# Altium PCB dsau-motherboard-revA.PcbDoc (part 3 of 4)
Units mil, origin at the board's own origin, x right, y up, seen from the top; angles counter-clockwise.
Board outline 9475 x 6400 mil, 4 copper layers (Component Side, Ground Plane, Power Plane, Solder Side), stack 65.2 mil thick; 212 components, 202 nets, 998 pads, 1047 vias.
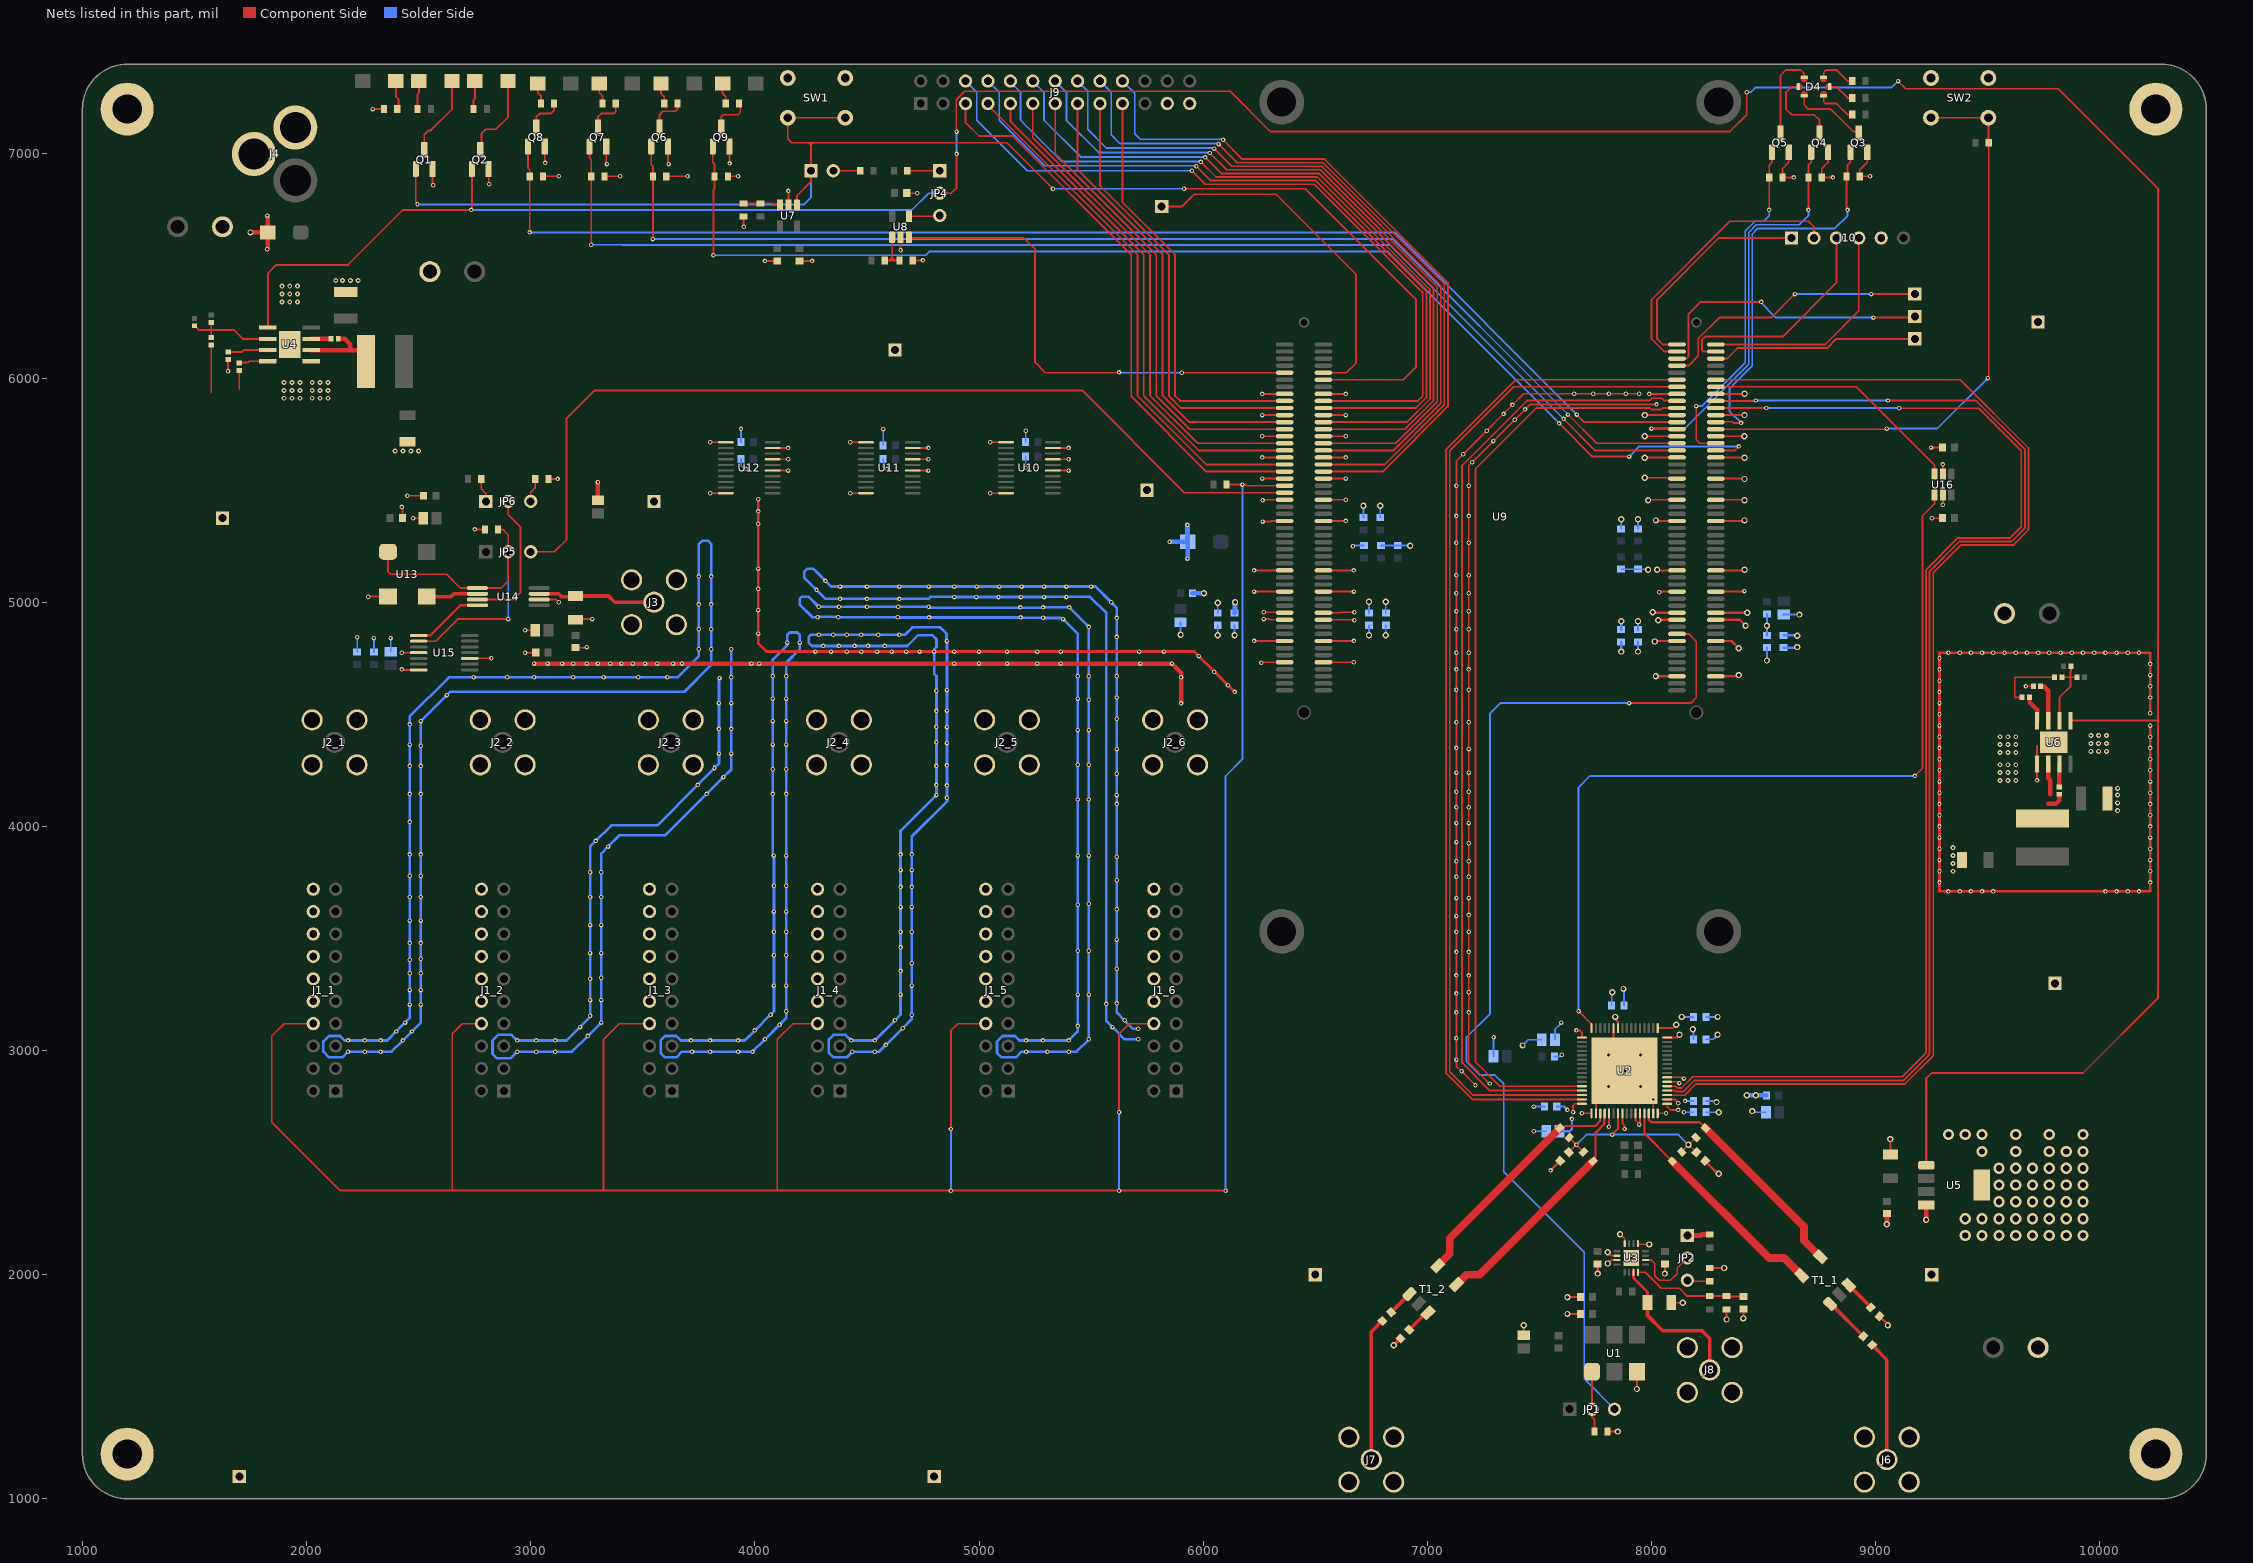
[diagram p5: the nets of this part, all layers, seen from the top]

## Via types
v1: diameter 20, hole 10, Component Side to Solder Side, 768 vias
v2: diameter 28, hole 16, Component Side to Solder Side, 117 vias
v3: diameter 22, hole 10, Component Side to Solder Side, 104 vias
v4: diameter 50, hole 28, Component Side to Solder Side, 46 vias
v5: diameter 28, hole 16, Component Side to Solder Side, tented top, 6 vias
v6: diameter 25.98, hole 12.99, Component Side to Solder Side, tented top, 5 vias
v7: diameter 25.98, hole 10, Component Side to Solder Side, tented top, 1 vias

## Nets (pads, with @x,y where several pads share a name; then routed paths per layer and width w, separated by ;. In a path a pad name is that pad's centre, name@x,y a point inside that pad or via, vN(x,y) a via of type N, cw(c..) or ccw(c..) an arc to the next point about the centre after c; other vN are vias at no path point) (continued)
GND: C2_1.2 C2_2.2 C3_1.1 C3_2.1 C4.2 C6.2 C7.2 C8.2 C9.2 C10.2 C11.2 C12.2 C13.2 C14.2 C15.2 C16.2 C17.2 C18.2 C19.2 C21.2 C22.2 C25.2 C26.2 C27.2 C28.2 C29.1 C31.1 C33.2 C34.2 C35.2 C36.2 C37.2 C38.2 C39.1 C40.2 C41.2 C42.2 C43.2 C44.2 C45.2 C46.2 C47.2 C48.2 C49.2 C50.2 C51.2 C52.2 C53.2 C54.2 C55.2 C56.2 C57.2 C58.2 C59.2 C60.1 C61.2 C62.1 C63.2 C64.1 C65.2 C66.2 C67.2 C68.2 C69.2 C70.2 C71.2 C72.2 C73.2 C74.2 C75.2 C76.1 C77.2 J1_1.10 J1_1.12 J1_1.14 J1_1.16 J1_1.18 J1_1.20 J1_2.10 J1_2.12 J1_2.14 J1_2.16 J1_2.18 J1_2.20 J1_3.10 J1_3.12 J1_3.14 J1_3.16 J1_3.18 J1_3.20 J1_4.10 J1_4.12 J1_4.14 J1_4.16 J1_4.18 J1_4.20 J1_5.10 J1_5.12 J1_5.14 J1_5.16 J1_5.18 J1_5.20 J1_6.10 J1_6.12 J1_6.14 J1_6.16 J1_6.18 J1_6.20 J2_1.2 J2_2.2 J2_3.2 J2_4.2 J2_5.2 J2_6.2 J3.2 J4.2 J4.3 J5.2 J6.2 J7.2 J8.2 J9.23 J9.25 J10.5 J11.2 J12.2 J13.2 pad.0 Q1.2 Q2.2 Q3.2 Q4.2 Q5.2 Q6.2 Q7.2 Q8.2 Q9.2 R4.2 R7.2 R10.2 R12.1 R15.1 R22.1 R23.1 R24.2 R25.2 R30.1 R31.2 R32.2 R33.2 R34.2 R35.2 R39.2 R40.2 R42.2 R43.1 SW1.2 SW2.2 TP1.1 TP2.1 TP3.1 TP4.1 TP5.1 TP6.1 TP7.1 TP8.1 TP9.1 TP10.1 U1.3 U2.17 U2.18 U2.21 U2.24 U2.27 U2.28 U2.31 U2.32 U2.39 U2.49 U2.59 U2.65 U3.9 U3.12 U3.14 U3.15 U3.17 U4.5 U4.EPAD U5.4 U5.5 U6.5 U6.EPAD U7.2 U8.2 U9.15 U9.16 U9.21 U9.22 U9.27 U9.28 U9.33 U9.34 U9.39 U9.40 U9.45 U9.46 U9.51 U9.52 U9.65 U9.66 U9.71 U9.72 U9.77 U9.85 U9.86 U9.95 U9.96 U9.115 U9.116 U9.121 U9.122 U9.127 U9.128 U9.133 U9.134 U9.139 U9.140 U9.145 U9.146 U9.151 U9.152 U9.165 U9.166 U9.171 U9.172 U9.177 U9.185 U9.186 U9.191 U9.192 U10.1 U10.10 U10.15 U10.17 U10.19 U11.1 U11.10 U11.15 U11.17 U11.19 U12.1 U12.10 U12.15 U12.17 U12.19 U13.2 U14.2 U15.4 U15.7 U15.10 U16.2 U16.5 | length 72415.3
  Component Side w8: 1575,5935 R7.2@1575,6148.5 ; v1(1650,6030) C27.2@1650,6083.5 ; 1700,5950 C28.2@1700,6033.5 ; v1(2275,5025) U13.2@2363.39,5025 ; v1(2295,7200) R22.1@2345.47,7200 ; v1(2425,4700) 2426.77,4698.23 U15.7@2500,4698.23 ; v1(2425,4775) U15.4@2500,4775 ; v1(2425,5425) 2427.56,5422.44 C68.2@2427.56,5375 ; v1(2450,5475) C67.2@2522.44,5475 ; v1(2475,5375) C66.2@2520.47,5375 ; Q1.2@2562.4,6932.68 2562.4,6862.6 v1(2565,6860) ; U15.10@2728.35,4749.41 2728.94,4750 v1(2825,4750) ; v1(2750,5325) R35.2@2795.47,5325 ; Q2.2@2812.4,6932.68 2812.4,6867.6 v1(2815,6865) ; v1(2975,4775) C71.2@3022.44,4775 ; v1(2975,4875) C70.2@3020.47,4875 ; U14.2@3037.8,5012.2 3112.8,5012.2 v1(3125,5000) ; R33.2@3054.53,6900 v1(3125,6900) ; Q8.2@3062.4,7032.68 3062.4,6962.6 v1(3065,6960) ; R42.2@3079.53,5550 v1(3120,5550) ; C72.2@3200,4797.44 3247.44,4797.44 v1(3250,4800) ; R43.1@3200,4921.85 3203.15,4925 v1(3275,4925) ; R32.2@3329.53,6900 v1(3400,6900) ; Q7.2@3337.4,7032.68 3337.4,6957.6 v1(3340,6955) ; R31.2@3604.53,6900 v1(3700,6900) ; Q6.2@3612.4,7032.68 3612.4,6957.6 v1(3615,6955) ; v1(3800.67,5486.61) U12.10@3870.67,5486.61 ; v1(3800.67,5713.39) U12.1@3870.67,5713.39 ; R34.2@3879.53,6900 v1(3925,6900) ; v1(3887.4,6957.68) Q9.2@3887.4,7032.68 ; v1@3950,6670 v1(3950,6675) R12.1@3950,6720.47 ; v1(4045,6522.44) C39.1@4100,6522.44 ; U12.15@4079.33,5587.4 v1(4149.33,5587.4) ; U12.17@4079.33,5637.8 v1(4149.33,5637.8) ; U12.19@4079.33,5688.19 v1(4149.33,5688.19) ; U7.2@4150,6772.24 v1(4150,6835) ; C37.2@4200,6522.44 v1(4255,6522.44) ; v1(4425.67,5486.61) U11.10@4495.67,5486.61 ; v1(4425.67,5713.39) U11.1@4495.67,5713.39 ; v1(4650,6570) U8.2@4650,6627.76 ; C38.2@4675,6822.44 C38.2@4677.56,6825 v1(4725,6825) ; R15.1@4700,6529.53 R15.1@4704.53,6525 v1(4750,6525) ; U11.15@4704.33,5587.4 v1(4774.33,5587.4) ; U11.17@4704.33,5637.8 v1(4774.33,5637.8) ; U11.19@4704.33,5688.19 v1(4774.33,5688.19) ; v1(5050.67,5486.61) U10.10@5120.67,5486.61 ; v1(5050.67,5713.39) U10.1@5120.67,5713.39 ; U10.15@5329.33,5587.4 v1(5399.33,5587.4) ; U10.17@5329.33,5637.8 v1(5399.33,5637.8) ; U10.19@5329.33,5688.19 v1(5399.33,5688.19) ; v1@6225,5050 v1(6227.36,5047.64) U9.172@6363.39,5047.64 ; v1@6225,5140 v1(6227.12,5142.12) U9.166@6363.39,5142.12 ; v1(6227.16,4827.16) U9.186@6363.39,4827.16 ; v1(6260,4730) 6262.68,4732.68 U9.192@6363.39,4732.68 6278.39,4732.68 ; v1@6263.39,5457.09 U9.146@6363.39,5457.09 ; v1(6263.39,5551.57) U9.140@6363.39,5551.57 ; v1(6263.39,5646.06) U9.134@6363.39,5646.06 ; v1(6263.39,5740.55) U9.128@6363.39,5740.55 ; v1(6263.39,5835.04) U9.122@6363.39,5835.04 ; v1(6263.39,5929.53) U9.116@6363.39,5929.53 ; v1(6265,5360) 6302.4,5360 6305,5362.6 U9.152@6363.39,5362.6 ; U9.191@6536.61,4732.68 v1(6672.32,4732.68) ; U9.185@6536.61,4827.16 v1(6672.84,4827.16) ; U9.177@6536.61,4953.15 6615,4953.15 6616.85,4955 v1(6675,4955) ; U9.171@6536.61,5047.64 v1(6672.64,5047.64) ; U9.165@6536.61,5142.12 v1(6672.12,5142.12) v1@6675,5145 ; U9.139@6536.61,5551.57 v1(6636.61,5551.57) ; U9.133@6536.61,5646.06 v1(6636.61,5646.06) ; U9.127@6536.61,5740.55 v1(6636.61,5740.55) ; U9.121@6536.61,5835.04 v1(6636.61,5835.04) ; U9.115@6536.61,5929.53 v1(6636.61,5929.53) ; 6617.6,5362.6 U9.151@6536.61,5362.6 v1(6636.61,5362.6) ; 6621.61,5457.09 U9.145@6536.61,5457.09 v1(6636.61,5457.09) ; v2@6850,1675 v2(6850,1685) ; v1(7185,3170) v1(7185,3260) ; v1(7185,3335) 7185,3315 ; v1(7185,3440) v1(7185,3530) ; v1@7185,3535 v1(7185,3605) ; v1(7185,3680) 7185,3700 ; v1(7185,3775) 7185,3810 ; v1(7185,3845) v1@7185,3850 ; v1(7185,3925) 7185,3935 ; v1@7185,4080 v1(7185,4155) ; v1(7185,4240) v1(7185,4345) ; v1(7215,2845) v1(7152.79,2907.21) 7130,2930 v1(7130,2960) v1(7130,3055) v1(7130,3170) v1(7130,3255) v1(7130,3335) v1(7130,3440) v1(7130,3530) v1(7130,3600) v1(7130,3680) v1(7130,3775) v1(7130,3845) v1(7130,3930) v1(7130,4015) v1(7130,4085) v1(7130,4155) v1(7130,4240) v1(7130,4350) v1(7130,4465) v1(7130,4610) v1(7130,4700) v1(7130,4775) v1(7130,4880) v1(7130,4960) v1(7130,5040) v1(7130,5120) v1(7130,5265) v1(7130,5520) 7130,5630 v1(7160,5660) v1(7265,5765) v1(7340,5840) v1(7380,5880) 7430,5930 7440,5930 ; v1(7278.11,2853) 7277,2853 7185,2945 v1(7185,3260) ; C15.2@7430,1729.53 v2(7430,1775) ; v2(7625,1825) C17.2@7682.44,1825 ; v2(7625,1900) C16.2@7682.44,1900 ; v1(7655,5930) 7440,5930 ; v1(7689.84,2719.84) U2.17@7732.36,2719.84 ; U2.18@7752.05,2707.05 U2.18@7752.05,2719.84 ; U2.18@7752.05,2732.83 U2.18@7752.05,2719.84 ; R4.2@7804.53,1300 v2(7850,1300) ; v5(7805,2050) 7820.16,2065.16 U3.15@7848.98,2065.16 ; v5(7805,2100) 7820,2085 7848.82,2085 U3.14@7848.98,2084.84 ; v1(7810,2660) 7811.1,2661.1 U2.21@7811.1,2732.83 ; v1(7810,5930) v1(7740,5930) ; 7811.1,2688.9 U2.21@7811.1,2732.83 ; 7811.1,2693.9 U2.21@7811.1,2732.83 ; U2.59@7830.79,3087.17 7830.79,2959.21 v6(7880,2910) ; v5(7860,2180) 7880.47,2159.53 U3.12@7880.47,2136.02 ; U2.24@7870.16,2732.83 7870.16,2674.84 7880,2665 v1(7880,2650) ; v1(7885,5930) 7910,5930 ; U2.27@7929.21,2732.83 7930,2732.83 U2.27@7930,2735 ; U2.27@7930,2719.84 7930,2719.05 U2.27@7929.21,2719.84 7929.21,2688.04 v1@7945,2672.25 ; v2(7935,1490) U1.3@7935,1567.32 ; U3.9@7939.53,2139 7942.5,2136.02 v5@7988.98,2136.02 ; v1@7945,2665 v1(7945,2670) 7948.9,2673.9 U2.28@7948.9,2719.84 U2.28@7948.9,2732.83 ; v1(7945,5930) 7910,5930 ; v2(7970,5555) 8110.46,5555 U9.40@8113.89,5551.57 ; v2(7970,5645) 7971.06,5646.06 U9.34@8113.89,5646.06 ; v2(7970,5740) 7970.55,5740.55 U9.28@8113.89,5740.55 ; v2(7970,5835) v2(7970,5835) U9.22@8113.89,5835.04 ; v2(7985,5455) 7987.09,5457.09 U9.46@8113.89,5457.09 ; v1(7990,5929.53) U9.16@8113.89,5929.53 ; U2.31@8007.95,2707.05 U2.31@8007.95,2719.84 ; U2.31@8007.95,2732.83 U2.31@8007.95,2719.84 ; v2(8020,5365) 8022.4,5362.6 U9.52@8113.89,5362.6 ; v1(8022.47,5882.53) 7458.65,5882.53 v1(7436.11,5860) v1(7390,5813.89) v1(7295,5718.89) v1(7200.56,5624.44) 7199.44,5624.44 7185,5610 v1(7185,4345) ; v2(8025,5145) 8027.88,5142.12 U9.66@8113.89,5142.12 ; U2.32@8027.64,2719.84 v1(8064.84,2719.84) ; U2.49@8027.64,3100.16 8095.16,3100.16 v2(8110,3115) ; v1(8035,5045) 8037.64,5047.64 U9.72@8113.89,5047.64 ; U2.39@8057.17,2880.47 8139.53,2880.47 v1(8145,2875) ; v2(8060,2005) C18.2@8060,2047.44 ; R30.1@8088.15,1875 v2(8140,1875) ; R39.2@8260,2029.53 8324.53,2029.53 v2(8325,2030) ; U9.71@8287.11,5047.64 8412.64,5047.64 v1(8415,5050) ; U9.65@8287.11,5142.12 8412.12,5142.12 v2(8415,5145) ; U9.51@8287.11,5362.6 8412.6,5362.6 v2(8415,5365) ; U9.45@8287.11,5457.09 8412.91,5457.09 v2(8415,5455) ; U9.39@8287.11,5551.57 8413.43,5551.57 v2(8415,5550) ; U9.33@8287.11,5646.06 8413.94,5646.06 v2(8415,5645) ; U9.27@8287.11,5740.55 v2(8414.45,5740.55) v2@8415,5740 ; U9.21@8287.11,5835.04 v2(8415,5835) v2(8415,5835) ; U9.15@8287.11,5929.53 8414.53,5929.53 v2(8415,5930) ; v2(8335,1800) R40.2@8335,1845.47 ; v2(8410,1805) C21.2@8410,1847.44 ; Q5.2@8612.4,7007.68 8612.4,6962.4 8584.53,6934.53 R25.2@8584.53,6895 v1(8634.53,6895) ; Q4.2@8787.4,7007.68 8787.4,6962.4 8759.53,6934.53 R24.2@8759.53,6895 ; 8799.53,6895 R24.2@8759.53,6895 ; v1(8809.53,6895) R24.2@8759.53,6895 ; Q3.2@8962.4,7007.68 8962.4,6962.4 8929.53,6929.53 R23.1@8929.53,6900 v1(8975,6900) ; v2(9065,2605) 9066,2604 C31.1@9066,2536.15 ; v1(9247.44,5690) C77.2@9297.44,5690 9260,5690 ; v1(9250,5375) C76.1@9297.44,5375 ; U16.5@9297.44,5475.2 U16.5@9300,5477.76 v1(9300,5435) ; U16.2@9300,5572.24 v1(9300,5615) ; C36.2@9653.5,4575.35 9620.35,4575.35 9620.35,4665.35 R10.2@9798.5,4665.35 ; v1@9670,4625 v1(9670.35,4625.35) C35.2@9703.5,4625.35 ; v1(9720,4205) U6.5@9720,4278.35 9720,4360 ; v1(7185,3260) 7185,3315 ; 7185,3315 v1(7185,3530) ; v1(7185,3530) v1(7185,3605) ; v1(7185,3605) 7185,3700 ; 7185,3700 7185,3810 ; 7185,3810 v1@7185,3850 ; v1@7185,3850 7185,3935 ; 7185,3935 v1(7185,4155) ; v1(7185,4155) v1(7185,4345) ; 7440,5930 v1(7740,5930) ; v1(7740,5930) 7910,5930 ; U2.18@7752.05,2719.84 7752.05,2782.05 v6(7880,2910) ; v6(7880,2910) v1(8007.95,2782.05) U2.31@8007.95,2719.84
  Component Side w10: v2(8015,4825) 8017.16,4827.16 U9.86@8113.89,4827.16 ; v2(8020,4670) 8020.32,4669.68 U9.96@8113.89,4669.68 ; U9.95@8287.11,4669.68 8384.16,4669.68 v2(8389.48,4675) ; U9.85@8287.11,4827.16 8357.31,4827.16 v2(8389.48,4795) ; U9.77@8287.11,4953.15 v2(8426.85,4953.15)
  Component Side w11.68: v1(7550,2465) C2_2.2@7592.48,2507.48 ; v2(7760,2005) C19.2@7760,2047.44 ; v5@7988.98,2136.02 v5(7990,2135) ; C2_1.2@8239.52,2507.48 8297,2450 v2(8300,2450) ; C3_1.1@9017.49,1814.51 9055,1777 v2(9055,1775)
  Component Side w12: v1(4015,5405) v1(4015,5460) v1(4015,5350) v1(4015,5150) v1(4015,5060) v1(4015,4965) v1(4015,4860) 4015.56,4859.44 4015.56,4815.56 4051.11,4780 v1(4270,4780) v1(4340,4780) v1(4410,4780) v1(4475,4780) v1(4545,4780) v1(4610,4780) v1(4675,4780) v1(4735,4780) v1(4800,4780) v1(4890,4780) v1(5000,4780) v1(5125,4780) v1(5260,4780) v1(5365,4780) v1(5715,4780) v1(5825,4780) 5960,4780 v1(5980,4760) v1(6050,4690) v1(6110.4,4629.6) v1(6140,4600) ; v1(10175,3710) 10220,3710 ; v1(10225,4450) v1@10225,4445 ; v1@10225,4454.35 v1@10225,4445 ; v1(10225,4505) 10225,4775 9285,4775 9285,3710 10220,3710 ; 10220,3710 10225,3710 v1@10225,4445
  Component Side w16.83: v2(6850,1685) C3_2.1@6880.51,1715.51
  Component Side w20: v2(1750,6650) C22.2@1826.18,6650 ; v1(1825,6575) 1826.18,6576.18 C22.2@1826.18,6650 ; v1(1825,6725) 1826.18,6723.82 C22.2@1826.18,6650 ; v1(3015,4726.4) v1(3075,4726.4) v1(3140,4726.4) v1(3190,4726.4) v1(3250,4726.4) v1(3300,4726.4) v1(3355,4726.4) v1(3405,4726.4) v1(3455,4726.4) v1(3510,4726.4) v1(3565,4726.4) v1(3635,4726.4) v1(3675,4726.4) v1(3985,4726.4) v1(4020,4726.4) ; C69.2@3300,5454.53 v1(3300,5535) ; 4150,4726.4 v1(4020,4726.4) ; 4803,4726.4 4775,4726.4 ; 4935,4726.4 v1(4890,4726.4) ; 5065,4726.4 v1(5000,4726.4) ; 5195,4726.4 v1(5125,4726.4) ; 5315,4726.4 v1(5260,4726.4) ; 5420,4726.4 v1(5365,4726.4) ; 5670,4726.4 5655,4726.4 ; v1(5720,4726.4) 5705,4726.4 ; 5825,4726.4 5775,4726.4 ; 5886.17,4701.17 5878.67,4708.67 ; v1(5901.4,4548.6) 5901.4,4640 ; 5901.4,4610 5901.4,4640 ; v2(9225,2245) 9225.98,2245.98 U5.4@9225.98,2311.42 ; v1(4020,4726.4) 4775,4726.4 ; 4775,4726.4 v1(4890,4726.4) ; v1(4890,4726.4) v1(5000,4726.4) ; v1(5000,4726.4) v1(5125,4726.4) ; v1(5125,4726.4) v1(5260,4726.4) ; v1(5260,4726.4) v1(5365,4726.4) ; v1(5365,4726.4) 5655,4726.4 ; 5655,4726.4 5705,4726.4 ; 5705,4726.4 5775,4726.4 ; 5775,4726.4 v1(5860.94,4726.4) 5878.67,4708.67 ; 5878.67,4708.67 5901.4,4685.94 v1(5901.4,4665) 5901.4,4640
  Component Side w22: v2(9050,2225) C29.1@9050,2272.44
  Solder Side w8: v1@2225.02,4845 v1(2225.85,4844.17) C75.2@2225.85,4777.56 ; v1(2300.02,4840) 2300.85,4839.17 C74.2@2300.85,4777.56 ; v1(2375.02,4840) 2375.85,4839.17 C73.2@2375.85,4779.53 ; C65.2@3938.23,5640 3938.23,5611.77 3955,5595 v1(3960,5595) ; C64.1@3938.23,5715 v1(3938.23,5773.23) v1@3940,5775 ; C63.2@4572.44,5639.98 4572.44,5607.56 4585,5595 v1(4590,5595) v1@4590,5590 ; C62.1@4572.44,5699.98 v1(4572.44,5772.44) v1@4575,5775 ; v1(5208.23,5600) C61.2@5208.23,5650 ; C60.1@5208.23,5715 v1(5208.23,5765) ; v2(5899.21,4855) C40.2@5899.21,4910.47 ; C41.2@5930,5268.82 C41.2@5931.18,5270 C41.2@5930,5270 ; v2(6065.02,4852.44) C48.2@6065.02,4897.44 ; v2(6140.02,4852.44) C49.2@6140.02,4897.44 ; v1(6668,5250) 6670.56,5252.56 C42.2@6718,5252.56 ; C52.2@6715,5377.56 v2(6715,5430) ; C46.2@6740.02,4952.56 v2(6740.02,5002.44) ; C50.2@6790,5377.56 v2(6790,5430) ; C44.2@6793,5252.56 C54.2@6868,5252.56 v2(6923,5252.56) ; C47.2@6815.02,4952.56 v2(6815.02,5002.44) ; C4.2@7295.47,2975 v1(7295.47,3059.53) ; v2(7425,3022.88) 7450,3047.88 C8.2@7510.5,3047.88 ; v1(7475,2640) C11.2@7530.47,2640 ; v1(7475,2750) C13.2@7522.44,2750 ; C10.2@7822.44,3200 7822.44,3257.44 v2(7825,3260) ; C53.2@7865.02,5147.44 C51.2@7940.02,5147.44 7982.56,5147.44 v2(7985,5145) ; C43.2@7865.02,5327.56 v2(7865,5370) ; C45.2@7940.02,5327.56 v2(7940,5370) ; C7.2@8242.56,3150 v2(8295,3150) ; C14.2@8242.59,2725 v2(8300,2725) ; C12.2@8242.59,2775 8285,2775 v2(8290,2770) ; C9.2@8242.59,3050 8275,3050 v2(8295,3070) ; v2(8450,2730) 8455,2725 C6.2@8510.5,2725
  Solder Side w10: 4545,4805 4610,4805 ; 4685,4810 4728,4853 4792,4853 4793,4852 ; v2(7865,4780) C57.2@7865.02,4822.44 ; v2(7940,4780) C56.2@7940.02,4822.44 ; v2(8515,4740) C59.2@8515.02,4797.44 ; C58.2@8590.02,4797.44 8647.44,4797.44 v2(8650,4800) ; C55.2@8590.02,4945.47 8659.53,4945.47 v2(8660,4945)
  Solder Side w12: v1(2745,4665) 2730,4665 ; v1(2895,4665) 2960,4665 ; 3750,5192 3750,5185 ; 3750,5215 3750,5200 ; 3820,4270 v1(3820,4260) ; v1@3840.23,4664.32 v1(3842.83,4661.72) 3840,4658.89 v1(3840,4550) v1(3840,4435) v1(3840,4325) 3840,4280 v1(3820,4260) ; 3895,4750 v1(3895,4790) v1(3895,4665) v1(3895,4550) v1(3895,4435) v1(3895,4325) 3895,4255 v1(3860,4220) v1(3785,4145) 3600,3960 3395,3960 v1(3345,3910) 3315,3880 v1(3315,3795) v1(3315,3685) v1(3315,3560) v1(3315,3435) v1(3315,3325) v1(3315,3225) v1(3315,3125) v1(3255,3065) 3185,2995 v1(3110,2995) v1(3025,2995) v1(2940,2995) 2910,2965 2850,2965 2830,2985 2830,3045 2855,3070 2915,3070 v1(2940,3045) v1(3025,3045) v1(3110,3045) 3160,3045 v1(3220,3105) 3265,3150 v1(3265,3155) v1(3265,3225) v1(3265,3320) v1(3265,3435) v1(3265,3560) v1(3265,3685) v1(3265,3795) 3265,3910 v1(3290,3935) 3360,4005 3565,4005 v1(3745,4185) v1(3820,4260) ; 4275,4990 v1(4285,4980) ; 4280,5130 4285,5125 ; 4296.13,5033.87 4305,5025 ; 4560,3000 4575,3015 ; v1@4635,4935 v1(4637,4933) ; 4685,4810 4680,4805 v1(4580,4805) v1(4505,4805) v1(4445,4805) v1(4375,4805) v1(4305,4805) 4255,4805 4240,4820 4240,4845 4250,4855 v1(4285,4855) v1(4350,4855) v1(4410,4855) v1(4475,4855) v1(4550,4855) v1(4645,4855) 4670,4855 4703,4888 ; 4706.89,4888.89 4706.89,4888 4703,4888 ; 4793,4852 4810,4835 4810,4800 4800,4790 4800,4765 ; v1(4800,4780) 4800,4765 ; v1@4860,4605 v1(4857,4608) ; v1@4888,5025 v1@4889,5024 ; v1@5185,4931.44 v1(5185.56,4932) ; v1(5185,4977) 5184,4976 4870,4976 ; v1@5287,4977 v1(5286,4977) ; v1@5490,4115 v1(5490,4120) ; 5568,3785 5568,3800 ; v1(5710,3050) 5650,3050 v1(5595,3105) 5568,3132 v1(5568,3208) 5568,3800 ; v1(5710,3097) 5688,3097 v1(5650,3135) 5615,3170 v1(5615,3210) v1(5615,3365) v1(5615,3495) v1(5615,3630) v1(5615,3760) v1(5615,3865) v1(5615,4100) v1(5615,4140) v1(5615,4235) v1(5615,4345) v1(5615,4480) v1(5615,4575) v1(5615,4670) v1(5615,4845) v1(5615,4930) 5615,4975 v1(5590,5000) 5520,5070 v1(5500,5070) v1(5390,5070) v1(5290,5070) v1(5190,5070) v1(5090,5070) v1(4990,5070) v1(4890,5070) v1(4775,5070) v1(4645,5070) v1(4500,5070) v1(4380,5070) 4340,5070 v1(4315,5095) 4285,5125 ; 2730,4665 2635,4665 2460,4490 v1(2460,4455) v1(2460,4365) v1(2460,4270) v1(2460,4145) v1(2460,4020) v1(2460,3875) v1(2460,3780) v1(2460,3685) v1(2460,3580) v1(2460,3480) v1(2460,3405) v1(2460,3345) v1(2460,3270) v1(2460,3205) 2460,3145 v1(2439.74,3124.74) v1(2400,3085) 2360,3045 v1(2330,3045) v1(2260,3045) v1(2185,3045) 2170,3045 2150,3065 2100,3065 2075,3040 2075,2995 2100,2970 2160,2970 v1(2185,2995) v1(2260,2995) v1(2330,2995) 2380,2995 v1(2430,3045) v1(2470,3085) 2510,3125 v1(2510,3205) v1(2510,3270) v1(2510,3345) v1(2510,3410) v1(2510,3480) v1(2510,3580) v1(2510,3685) v1(2510,3780) v1(2510,3875) v1(2510,4145) v1(2510,4270) v1(2510,4360) v1(2510,4470) 2510.47,4470 v1(2626.4,4585.94) 2640.47,4600 3685,4600 3805,4720 v1(3805,4790) v1(3805,4880) v1(3805,4990) v1(3805,5115) 3805,5260 3790,5275 3766.06,5275 3750,5258.94 3750,5200 ; 2730,4665 2960,4665 ; 2960,4665 v1(3015,4665) v1(3190,4665) v1(3325,4665) v1(3480,4665) v1(3610,4665) 3655,4665 3750,4760 v1(3750,4790) v1(3750,4880) v1(3750,4990) v1(3750,5115) 3750,5185 ; 3750,5185 3750,5200 ; v1(4285,4980) 4240,5025 4210,5025 4200,5015 4200,4990 4257,4933 v1(4280,4933) 4282,4935 4370,4935 v1(4372,4933) v1(4637,4933) ; v1(4285,4980) v1(4375,4980) v1(4500,4980) v1(4640,4980) v1(4775,4980) 4779,4976 4870,4976 ; 4285,5125 4260,5150 4235,5150 4220,5135 4220,5110 v1(4275,5055) 4305,5025 ; 4305,5025 4315,5015 v1(4380,5015) v1(4500,5015) 4525,5015 v1(4645,5015) 4755,5015 4775,5015 4784,5024 v1@4889,5024 ; 4575,3015 4555,2995 v1(4535,2995) v1(4435,2995) 4410,2970 4350,2970 4330,2990 4330,3050 4350,3070 4405,3070 v1(4430,3045) v1(4535,3045) v1(4625,3135) 4650,3160 v1(4650,3250) v1(4650,3355) v1(4650,3460) v1(4650,3530) v1(4650,3640) v1(4650,3730) v1(4650,3805) v1(4650,3875) 4650,3980 v1(4810,4140) v1(4810,4185) v1(4810,4270) v1(4810,4375) v1(4810,4445) v1(4810,4515) v1(4810,4605) 4810,4670 4800,4680 4800,4765 ; 4575,3015 v1(4585,3025) v1(4660,3100) 4700,3140 v1(4700,3160) v1(4700,3290) v1(4700,3390) v1(4700,3530) v1(4700,3640) v1(4700,3730) v1(4700,3805) v1(4700,3875) 4700,3955 4857,4112 v1(4857,4128) v1(4857,4183) v1(4857,4272) v1(4857,4372) v1(4857,4443) v1(4857,4517) v1(4857,4608) ; v1(4637,4933) 4638,4932 v1(4777,4932) v1(5185.56,4932) ; 4703,4888 4827,4888 4855,4860 4855,4829 v1(4857,4827) v1(4857,4608) ; 4870,4976 5285,4976 v1(5286,4977) ; v1@4889,5024 v1(4890,5023) v1(4988,5023) v1(5087,5023) v1(5187,5023) v1(5290,5023) 5292,5025 5388,5025 v1(5390,5023) 5391,5024 5496,5024 5568,4952 5568,3800 ; v1(5185.56,4932) 5187,4930.56 v1(5285.56,4930.56) 5286.11,4930 5365,4930 5370,4925 v1(5375,4925) 5440,4860 v1(5440,4670) v1(5440,4570) v1(5440,4430) v1(5440,4275) v1(5440,4120) v1(5440,3870) v1(5440,3650) v1(5440,3445) v1(5440,3250) v1(5440,3110) 5440,3085 v1(5400,3045) v1(5285,3045) v1(5210,3045) 5180,3045 5160,3065 5105,3065 5080,3040 5080,2990 5100,2970 5165,2970 5190,2995 v1(5210,2995) v1(5305,2995) v1(5400,2995) 5435,2995 v1(5490,3050) v1(5490,3250) v1(5490,3445) v1(5490,3655) v1(5490,3870) v1(5490,4120) ; v1(5286,4977) v1(5403,4977) v1(5490,4890) v1(5490,4670) v1(5490,4565) v1(5490,4430) v1(5490,4275) v1(5490,4120) ; 3580,2990 3580,3045 3600,3065 3650,3065 3670,3045 v1(3715,3045) v1(3800,3045) v1(3925,3045) 3955,3045 v1(4000,3090) v1(4070,3160) 4085,3175 v1(4085,3290) v1(4085,3425) v1(4085,3530) v1(4085,3620) v1(4085,3735) v1(4085,3870) 4080,3875 v1(4080,4145) v1(4080,4255) v1(4080,4365) v1(4080,4470) v1(4080,4570) v1(4080,4670) 4080,4745 4145,4810 v1(4145,4820) 4145,4855 4155,4865 4190,4865 4200,4855 v1(4200,4820) 4200,4790 4140,4730 v1(4140,4670) v1(4140,4570) v1(4140,4470) v1(4140,4365) v1(4140,4255) v1(4140,4145) v1(4140,3870) v1(4140,3735) v1(4140,3425) v1(4140,3290) v1(4140,3175) 4140,3145 v1(4110,3115) v1(4045,3050) v1(3990,2995) v1(3925,2995) v1(3800,2995) v1(3720,2995) 3675,2995 3650,2970 3600,2970 3580,2990
  Solder Side w20: v1(5850,5270) C41.2@5930,5270 ; v1(5930,5195) 5931.18,5196.18 C41.2@5931.18,5270 5931.18,5343.82 v1(5930,5345) C41.2@5930,5270 ; C41.2@5930,5268.82 C41.2@5930,5270
  other v1: 4140,3530 4140,3620 9325,3710 9375,3710 9425,3710 9475,3710 9525,3710 10025,3710 10075,3710 10125,3710 9285,3750 10225,3750 9285,3800 10225,3800 9285,3850 10225,3850 9285,3900 10225,3900 9285,3950 10225,3950 9285,4000 10225,4000 7185,4015 9285,4050 10225,4050 7185,4085 9285,4100 10225,4100 9285,4150 10225,4150 9285,4200 10225,4200 9285,4250 10225,4250 9285,4300 10225,4300 9285,4350 10225,4350 9285,4400 10225,4400 9285,4450 7185,4465 9285,4500 9285,4550 10225,4575 9285,4600 7185,4610 10225,4625 9285,4650 10225,4675 7185,4700 9285,4700 10225,4725 9285,4750 7185,4775 9325,4775 9375,4775 9425,4775 9475,4775 9525,4775 9575,4775 9625,4775 9675,4775 9725,4775 9775,4775 9825,4775 9875,4775 9925,4775 9975,4775 10025,4775 10075,4775 10125,4775 10175,4775 7185,4880 7185,4960 7185,5040 7185,5120 7185,5265 7130,5385 7185,5385 6265,5455 7185,5520
  other v3: 9345,3800 9345,3835 9345,3870 9345,3905 10080,4070 10080,4105 10080,4140 10080,4170 9555,4205 9590,4205 9625,4205 9555,4240 9590,4240 9625,4240 9555,4275 9590,4275 9625,4275 9555,4330 9590,4330 9625,4330 9960,4335 9995,4335 10030,4335 9555,4365 9590,4365 9625,4365 9960,4370 9995,4370 10030,4370 9795,4375.35 9555,4400 9590,4400 9625,4400 9960,4405 9995,4405 10030,4405 2395.35,5675 2430.35,5675 2465.35,5675 2500.35,5675 1900.35,5910 1935.35,5910 1970.35,5910 2025.35,5910 2060.35,5910 2095.35,5910 1900.35,5945 1935.35,5945 1970.35,5945 2025.35,5945 2060.35,5945 2095.35,5945 1900.35,5980 1935.35,5980 1970.35,5980 2025.35,5980 2060.35,5980 2095.35,5980 1925,6150 1890,6340 1925,6340 1960,6340 1890,6375 1925,6375 1960,6375 1890,6410 1925,6410 1960,6410 2130.35,6435 2160.35,6435 2195.35,6435 2230.35,6435
  other v4: 9400,2175 9475,2175 9550,2175 9625,2175 9700,2175 9775,2175 9850,2175 9925,2175 9400,2250 9475,2250 9550,2250 9625,2250 9700,2250 9775,2250 9850,2250 9925,2250 9550,2325 9625,2325 9700,2325 9775,2325 9850,2325 9925,2325 9550,2400 9625,2400 9700,2400 9775,2400 9850,2400 9925,2400 9550,2475 9625,2475 9700,2475 9775,2475 9850,2475 9925,2475 9475,2550 9625,2550 9775,2550 9850,2550 9925,2550 9325,2625 9400,2625 9475,2625 9625,2625 9775,2625 9925,2625
  other v6: 7809.13,2839.13 7950.87,2839.13 7809.13,2980.87 7950.87,2980.87
  other v7: 7910,2075
GPIO0: J9.5 U9.138 | length 2523.3
  Component Side w8: J9.5@4940,7225 4940,7140 5000,7080 5149,7080 5679,6550 5679,5918.37 6014.3,5583.07 U9.138@6363.39,5583.07
GPIO1: J9.7 U9.136 | length 2363.1
  Component Side w8: J9.7@5040,7225 5040,7217 5707,6550 5707,5921.89 6014.32,5614.57 U9.136@6363.39,5614.57
GPIO2: J9.9 U9.132 | length 2279.2
  Component Side w8: J9.9@5140,7225 5140,7145 5735,6550 5735,5921.89 5979.33,5677.56 U9.132@6363.39,5677.56
GPIO3: J9.11 U9.130 | length 2208.3
  Component Side w8: J9.11@5240,7225 5240,7073 5763,6550 5763,5921.89 5975.83,5709.05 U9.130@6363.39,5709.05
GPIO4: J9.13 U9.126 | length 2124.4
  Component Side w8: J9.13@5340,7225 5340,7001 5791,6550 5791,5921.89 5940.84,5772.05 U9.126@6363.39,5772.05
GPIO5: J9.15 U9.124 | length 2053.5
  Component Side w8: J9.15@5440,7225 5440,6929 5819,6550 5819,5921.89 5937.34,5803.54 U9.124@6363.39,5803.54
GPIO6: J9.17 U9.120 | length 1970.4
  Component Side w8: J9.17@5540,7225 5540,6857 5847,6550 5847,5920.42 5900.88,5866.53 U9.120@6363.39,5866.53
GPIO7: J9.19 U9.118 | length 1899.8
  Component Side w8: J9.19@5640,7225 5640,6785 5875,6550 5875,5920 5896.97,5898.03 U9.118@6363.39,5898.03
GPIO8: J9.20 U9.137 | length 3158.1
  Component Side w8: v1(6088.59,7063.59) 6175.19,6977 6541.39,6977 7092,6426.39 7092,5873.66 6801.41,5583.07 U9.137@6536.61,5583.07
  Solder Side w8: J9.20@5640,7325 5695,7270 5695,7090 5719.21,7065.79 6086.39,7065.79 v1(6088.59,7063.59)
GPIO9: J9.18 U9.135 | length 3211.2
  Component Side w8: v1(6068.79,7043.79) 6151.59,6961 6534.76,6961 7076,6419.76 7076,5880.28 6810.28,5614.57 U9.135@6536.61,5614.57
  Solder Side w8: J9.18@5540,7325 5590,7275 5590,7085 5629.01,7045.99 6066.59,7045.99 v1(6068.79,7043.79)
GPIO10: J9.16 U9.131 | length 3233.6
  Component Side w8: v1(6048.99,7023.99) 6127.99,6945 6528.14,6945 7060,6413.14 7060,5886.91 6850.65,5677.56 U9.131@6536.61,5677.56
  Solder Side w8: J9.16@5440,7325 5485,7280 5485,7110 5568.8,7026.2 6046.79,7026.2 v1(6048.99,7023.99)
GPIO11: J9.14 U9.129 | length 3254.4
  Component Side w8: v1(6029.2,7004.2) 6104.39,6929 6521.51,6929 7044,6406.51 7044,5893.54 6859.52,5709.05 U9.129@6536.61,5709.05
  Solder Side w8: J9.14@5340,7325 5390,7275 5390,7150 5533.6,7006.4 6026.99,7006.4 v1(6029.2,7004.2)
GPIO12: J9.12 U9.125 | length 3288.6
  Component Side w8: v1(6009.4,6984.4) 6080.79,6913 6514.88,6913 7028,6399.88 7028,5900.16 6899.88,5772.05 U9.125@6536.61,5772.05
  Solder Side w8: J9.12@5240,7325 5290,7275 5290,7150 5453.4,6986.6 6007.2,6986.6 v1(6009.4,6984.4)
GPIO13: J9.10 U9.123 | length 3338.7
  Component Side w8: v1(5989.6,6964.6) 6057.2,6897 6508.25,6897 7012,6393.25 7012,5906.79 6908.75,5803.54 U9.123@6536.61,5803.54
  Solder Side w8: J9.10@5140,7325 5140,7320 5185,7275 5185,7150 5368.2,6966.8 5987.4,6966.8 v1(5989.6,6964.6)
GPIO14: J9.8 U9.119 | length 3369.9
  Component Side w8: v1(5969.8,6944.8) 6033.6,6881 6501.63,6881 6996,6386.63 6996,5913.42 6949.12,5866.53 U9.119@6536.61,5866.53
  Solder Side w8: J9.8@5040,7325 5090,7275 5090,7150 5293,6947 5967.6,6947 v1(5969.8,6944.8)
GPIO15: J9.6 U9.117 | length 3417.1
  Component Side w8: v1(5950,6925) 6010,6865 6495,6865 6980,6380 6980,5920.05 6957.98,5898.03 U9.117@6536.61,5898.03
  Solder Side w8: J9.6@4940,7325 4990,7275 4990,7150 5215,6925 v1(5950,6925)
INPUTA_N: R2_1.1 T1_1.4 U2.30 | length 1095.5
  Component Side w10: U2.30@7988.27,2732.83 7988.27,2691.73 8000,2680 8214.82,2680 R2_1.1@8240.91,2653.91
  Component Side w35.12: R2_1.1@8240.91,2653.91 8680,2214.82 8680,2153.52 T1_1.4@8753.42,2080.09
INPUTA_P: R1_1.2 T1_1.5 U2.29 | length 1066.2
  Component Side w10: U2.29@7968.58,2732.83 7968.58,2630.59 R1_1.2@8093.09,2506.09
  Component Side w35.12: R1_1.2@8093.09,2506.09 8524.18,2075 8591.48,2075 T1_1.5@8669.91,1996.58
INPUTB_N: R2_2.1 T1_2.4 U2.20 | length 1076.4
  Component Side w10: R2_2.1@7738.91,2508.91 R2_2.1@7738.91,2506.09 R2_2.1@7741.09,2506.09 ; R2_2.1@7750,2515 7750,2575 7750,2632.53 7789.73,2672.26 7789.73,2731.15 U2.20@7791.42,2732.83
  Component Side w35.12: T1_2.4@7130.09,1956.58 7131.58,1956.58 7175,2000 7232.82,2000 R2_2.1@7738.91,2506.09
INPUTB_P: R1_2.2 T1_2.5 U2.19 | length 1065.6
  Component Side w10: R1_2.2@7601.09,2663.91 7748.91,2663.91 7771.73,2686.73 U2.19@7771.73,2732.83
  Component Side w35.12: T1_2.5@7046.58,2040.09 7100,2093.52 7100,2162.82 R1_2.2@7591.09,2653.91
NetC1_1_1: C1_1.1 J6.1 | length 513.6
  Component Side w15.74: C1_1.1@8984.49,1686.51 9050,1621 J6.1@9050,1200
NetC1_1_2: C1_1.2 T1_1.1 | length 206.7
  Component Side w16.8: T1_1.1@8796.58,1869.91 T1_1.1@8805.09,1869.91 ; T1_1.1@8805.09,1864.91 8944.51,1725.49 C1_1.2@8945.51,1725.49
NetC1_2_1: C1_2.1 J7.1 | length 629.6
  Component Side w15.74: C1_2.1@6805.51,1785.51 C1_2.1@6805.51,1800.51
  Component Side w16.8: J7.1@6750,1200 6750,1745 6798.51,1793.51 C1_2.1@6799.51,1793.51
NetC1_2_2: C1_2.2 T1_2.1 | length 106.7
  Component Side w16.8: C1_2.2@6844.49,1838 T1_2.1@6919.91,1913.42
NetC3_1_2: C3_1.2 T1_1.3 | length 142
  Component Side w16.8: T1_1.3@8880.09,1953.42 C3_1.2@8980.51,1853
NetC3_2_2: C3_2.2 T1_2.3 | length 115.2
  Component Side w16.83: C3_2.2@6919.49,1754.49 6994.91,1829.91 T1_2.3@7003.42,1829.91
NetC7_1: C7.1 C8.1 C9.1 C10.1 L2.2 U2.1 U2.38 U2.48 U2.58 | length 607.9
  Component Side w8: v1(7665,3090) 7680,3090 7690,3080 U2.1@7690,3057.64 ; U2.1@7689.84,3057.64 U2.1@7702.83,3057.64 ; v2(7838.26,3150) 7838.26,3140 7850.47,3127.79 U2.58@7850.47,3087.17 ; U2.48@8057.17,3057.64 8112.64,3057.64 v2(8125,3070) ; U2.38@8089.21,2860.79 8057.17,2860.79 8119.21,2860.79 v1(8125,2855) ; U2.58@7850.47,3087.17 7850,3087.64 U2.58@7850.47,3087.17
  Solder Side w8: L2.2@7567.59,2972.88 7591.51,2972.88 v1(7600,2981.37) ; C8.1@7569.56,3047.88 7569.56,3094.56 7597,3122 v1(7597,3125) ; v2(7875,3275) 7877.56,3272.44 C10.1@7877.56,3200 ; v2(8135,3150) C7.1@8187.44,3150 ; v2(8185,3095) 8187.47,3092.53 C9.1@8187.47,3050
NetC11_1: C11.1 C12.1 C13.1 C14.1 L1.1 U2.16 U2.33 U2.34 | length 587.9
  Component Side w8: v1(7650,2725) 7650,2755 7657.36,2762.36 U2.16@7689.84,2762.36 ; U2.16@7687.36,2762.36 U2.16@7689.84,2762.36 ; U2.16@7702.83,2762.36 U2.16@7689.84,2762.36 ; U2.33@8057.17,2762.36 U2.33@8070.16,2762.36 ; U2.34@8057.17,2782.05 8102.95,2782.05 v1(8120,2765) ; U2.33@8082.64,2762.36 U2.33@8070.16,2762.36 ; v1@8110,2735 v1(8120,2735) 8085,2735 8070.16,2749.84 U2.33@8070.16,2762.36
  Solder Side w8: v1(8145,2725) C14.1@8187.47,2725 ; v1(8150,2775) C12.1@8187.47,2775
  Solder Side w10: C13.1@7577.56,2750 7600,2750 7610,2750 v1(7625,2735) ; C11.1@7589.53,2640 7635,2640 7645,2650 v1(7645,2695)
  Solder Side w20: v2(8425,2800) v2(8465,2800) L1.1@8512.47,2800
NetC21_1: C21.1 R38.2 R40.1 U3.4 | length 515.4
  Component Side w8: U3.4@7939.53,2011 7972.98,2011 8043.98,1940 8125,1940 8160.47,1904.53 R38.2@8260,1904.53 R40.1@8335,1904.53 8336.97,1902.56 C21.1@8410,1902.56
NetC23_1: C23.1 U4.7 | length 86.5
  Component Side w20: U4.7@2022,6175 C23.1@2108.5,6175
NetC23_2: C23.2 L4.2 U4.6 | length 342.6
  Component Side w20: U4.6@2022,6125 2195,6125 ; C23.2@2141.5,6175 2170,6175 2195,6150 2195,6125 ; L4.2@2265.35,6100 2240.35,6125 2195,6125
NetC24_2: C24.2 R6.2 R7.1 U4.2 | length 419.2
  Component Side w8: C24.2@1500,6233.5 1518.5,6215 1575,6215 ; R7.1@1575,6181.5 1575,6215 ; R6.2@1575,6248.5 1575,6215 ; U4.2@1828,6175 1715,6175 1675,6215 1575,6215
NetC27_1: C27.1 U4.3 | length 181.5
  Component Side w8: C27.1@1650,6116.5 1711.5,6116.5 1720,6125 U4.3@1828,6125
NetC28_1: C28.1 U4.4 | length 131.5
  Component Side w8: C28.1@1700,6066.5 1703.5,6070 1740,6070 1745,6075 U4.4@1828,6075
NetC30_1: C30.1 U6.7 | length 116.9
  Component Side w20: C30.1@9820,4176.5 9820,4225 ; 9820,4210 9820,4225 ; U6.7@9820,4278.35 9820,4225
NetC30_2: C30.2 L5.2 U6.6 | length 221.9
  Component Side w20: 9770,4100 9803,4100 9820,4117 C30.2@9820,4143.5 ; U6.6@9770,4278.35 9770,4215 9778.5,4206.5 9778.5,4143.5
NetC32_2: C32.2 R8.2 R10.1 U6.2 | length 330.9
  Component Side w8: U6.2@9820,4472.35 9820,4575 9870,4625 9870,4665 ; R10.1@9831.5,4665.35 9831.85,4665 9870,4665 ; C32.2@9871.5,4714.65 9871.5,4691.5 9870,4690 9870,4665 ; R8.2@9898.5,4665.35 9898.15,4665 9870,4665
NetC35_1: C35.1 U6.3 | length 174.6
  Component Side w20: C35.1@9736.5,4625.35 9749.65,4625.35 9770,4605 U6.3@9770,4472.35
NetC36_1: C36.1 U6.4 | length 116.9
  Component Side w20: C36.1@9686.5,4575.35 9686.5,4553.5 9720,4520 U6.4@9720,4472.35
NetC46_1: C46.1 C47.1 C48.1 C49.1 L6.2 U9.178 U9.179 U9.180 | length 658.3
  Component Side w8: v1@6270,4921.65 6268.35,4921.65 6270,4923.3 v1(6270,4925) 6296.65,4925 6300,4921.65 U9.180@6363.39,4921.65 ; v1@6270,4953.15 6268.15,4953.15 v1(6270,4955) 6361.53,4955 U9.178@6363.39,4953.15 ; 6623.35,4921.65 U9.179@6536.61,4921.65 6673.35,4921.65 v1(6675,4920)
  Solder Side w8: C48.1@6065.02,4952.56 v2(6065.02,4997.56) ; v2(6740.02,4852.44) C46.1@6740.02,4897.44 ; v2(6815.02,4852.44) C47.1@6815.02,4897.44
  Solder Side w22: L6.2@5953.35,5040 v2(6003.35,5040) ; C49.1@6140.02,4952.56 6142.46,4955 v2(6142.46,5000)
NetC56_1: C56.1 C57.1 C58.1 C59.1 L7.2 U9.78 U9.79 U9.80 | length 568.4
  Component Side w10: v2(8005.62,4955) 8007.47,4953.15 U9.78@8113.89,4953.15 ; v2(8030,4920) 8031.65,4921.65 U9.80@8113.89,4921.65 ; U9.79@8287.11,4921.65 8393.35,4921.65 v2(8420,4895)
  Solder Side w10: C57.1@7865.02,4877.56 v2(7865,4915) ; C56.1@7940.02,4877.56 v2(7940,4915) ; C59.1@8515.02,4852.56 v2(8515,4895) L7.2@8515.02,4947.44 ; C58.1@8590.02,4852.56 8647.44,4852.56 v2(8650,4850)
NetD1_2: D1.2 R22.2 | length 131.9
  Component Side w8: D1.2@2398.82,7325 2398.82,7256.18 2410,7245 2410,7205.47 R22.2@2404.53,7200
NetD2_1: D2.1 R16.1 | length 127.8
  Component Side w8: R16.1@2495.47,7200 2495.47,7264.53 2495,7265 2501.18,7271.18 D2.1@2501.18,7325
NetD2_2: D2.2 Q1.3 | length 364.8
  Component Side w8: Q1.3@2525,7017.32 2525,7085 2545,7105 2555,7105 2648.82,7198.82 D2.2@2648.82,7325
NetD3_1: D3.1 R17.1 | length 127.8
  Component Side w8: R17.1@2745.47,7200 2745,7200.47 2745,7240 2751.18,7246.18 D3.1@2751.18,7325
NetD3_2: D3.2 Q2.3 | length 385.3
  Component Side w8: Q2.3@2775,7017.32 2780,7022.32 2780,7090 2800,7110 2845,7110 2898.82,7163.82 D3.2@2898.82,7325
NetD4_1: D4.1 Q5.3 | length 398.6
  Component Side w8: Q5.3@8575,7092.32 8575,7350 8600,7375 8665,7375 8681.69,7358.31 D4.1@8681.69,7341.34
NetD4_2: D4.2 Q4.3 | length 367.9
  Component Side w8: D4.2@8654.13,7300 8625,7300 8600,7275 8600,7200 8625,7175 8725,7175 8750,7150 Q4.3@8750,7092.32
NetD4_3: D4.3 Q3.3 | length 335.8
  Component Side w8: D4.3@8681.69,7258.66 8681.69,7218.31 8700,7200 8800,7200 8850,7150 8900,7100 8917.32,7100 Q3.3@8925,7092.32
NetD4_4: D4.4 R19.1 | length 177.6
  Component Side w8: D4.4@8768.31,7258.66 8768.31,7231.69 8775,7225 8825,7225 8875,7175 R19.1@8895.47,7175
NetD4_5: D4.5 R20.1 | length 120.3
  Component Side w8: D4.5@8795.87,7300 8825,7300 8875,7250 R20.1@8895.47,7250
NetD4_6: D4.6 R21.1 | length 174.7
  Component Side w8: D4.6@8768.31,7341.34 8768.31,7363.31 8780,7375 8825,7375 8875,7325 R21.1@8895.47,7325
NetD5_2: D5.2 R26.2 | length 95.9
  Component Side w8: D5.2@3581.18,7315 3581.18,7268.82 3595.47,7254.53 R26.2@3595.47,7225
NetD6_2: D6.2 R27.2 | length 95.9
  Component Side w8: D6.2@3306.18,7315 3306.18,7273.82 3320.47,7259.53 R27.2@3320.47,7225
NetD7_2: D7.2 R28.2 | length 95.9
  Component Side w8: D7.2@3031.18,7315 3031.18,7273.82 3045.47,7259.53 R28.2@3045.47,7225
NetD8_2: D8.2 R29.2 | length 95.9
  Component Side w8: D8.2@3856.18,7315 3856.18,7268.82 3870.47,7254.53 R29.2@3870.47,7225
NetJ1_1_8: J1_1.8 J1_2.8 J1_3.8 J1_4.8 J1_5.8 J1_6.8 R5.1 U9.142 | length 12813.8
  Component Side w8: J1_1.8@2030,3120 1900,3120 1845,3065 1845,2680 2150,2375 2650,2375 ; J1_2.8@2780,3120 2695,3120 2650,3075 2650,2375 ; J1_3.8@3530,3120 3395,3120 3325,3050 3325,2375 ; J1_4.8@4280,3120 4170,3120 4100,3050 4100,2375 ; v1(4875,2650) 4875,3090 4905,3120 J1_5.8@5030,3120 ; v1(5625,2725) 5625,3075 5670,3120 J1_6.8@5780,3120 ; v1(6100,2375) 4100,2375 ; R5.1@6104.53,5525 v1(6175,5525) 6190,5525 6195,5520 6363.31,5520 U9.142@6363.39,5520.08 ; 2650,2375 3325,2375 ; 3325,2375 4100,2375
  Solder Side w8: v1(4875,2375) v1(4875,2650) ; v1(5625,2375) v1(5625,2725) ; v1(6100,2375) 6100,4225 6175,4300 v1(6175,5525)
NetJ3_1: J3.1 R43.2 U14.3 | length 530.5
  Component Side w11.23: R43.2@3196.85,5025 R43.2@3200,5028.15
  Component Side w16.8: U14.3@3037.8,5037.8 3038.13,5037.46 3124.87,5037.46 3137.34,5025 R43.2@3196.85,5025 ; R43.2@3200,5028.15 3346.85,5028.15 3375,5000 J3.1@3550,5000
NetJ8_1: J8.1 R30.2 U3.3 | length 682.4
  Component Side w12.35: U3.3@7919.84,2013.98 U3.3@7919.84,2011 7919.84,1985.16 7981.85,1923.15 7981.85,1920 R30.2@7981.85,1875
  Component Side w16.8: R30.2@7981.85,1875 7981.85,1818.15 8050,1750 8225,1750 8260,1715 J8.1@8260,1575
NetJP1_2: JP1.2 R4.1 U1.1 | length 277.1
  Component Side w8: U1.1@7735,1567.32 JP1.2@7735,1400 7735,1365 7745.47,1354.53 R4.1@7745.47,1300 ; R4.1@7750,1300 R4.1@7755.47,1300
NetJP1_3: JP1.3 U9.84 | length 4760.5
  Component Side w8: v1(7900,4550) 8175,4550 8200,4575 8200,4825 8166.34,4858.66 U9.84@8113.89,4858.66
  Solder Side w8: JP1.3@7835,1400 7700,1535 7700,2100 7341,2459 7341,2851.63 7301.63,2891 7234,2891 7175,2950 7175,3060 7280,3165 7280,4505 7325,4550 v1(7900,4550)
NetJP2_1: JP2.1 R37.2 | length 101.9
  Component Side w22: JP2.1@8160,2175 8220,2175 8224.53,2179.53 R37.2@8260,2179.53
NetJP2_2: JP2.2 U3.6 | length 314.6
  Component Side w8: U3.6@7971.02,2065.16 7999.84,2065.16 8015,2050 8015,1995 8035,1975 8085,1975 8115,2005 8115,2030 JP2.2@8160,2075
NetJP2_3: JP2.3 R39.1 | length 101.9
  Component Side w8: JP2.3@8160,1975 8164.53,1970.47 R39.1@8260,1970.47
NetJP3_2: JP3.2 R9.2 | length 120.5
  Component Side w8: JP3.2@4350,6925 R9.2@4470.47,6925
NetJP4_1: JP4.1 R13.2 | length 145.5
  Component Side w8: R13.2@4679.53,6925 JP4.1@4825,6925
NetJP4_3: JP4.3 U8.4 | length 138.7
  Component Side w8: U8.4@4687.4,6722.24 4822.24,6722.24 JP4.3@4825,6725
NetJP5_2: JP5.2 R35.1 U13.1 U14.5 U15.2 | length 1670.2
  Component Side w8: U13.1@2363.39,5225 2363.39,5136.61 2375,5125 2625,5125 2686.61,5063.39 U14.5@2762.2,5063.39 2868.39,5063.39 2900,5095 JP5.2@2900,5225 2900,5300 2875,5325 R35.1@2854.53,5325 ; U15.2@2500,4826.18 2576.18,4826.18 2675,4925 v1(2900,4925)
  Solder Side w8: v1(2900,4925) JP5.2@2900,5225
NetJP5_3: JP5.3 U9.144 | length 4167
  Component Side w8: JP5.3@3000,5225 3105,5225 3160,5280 3160,5820 3285,5945 5460,5945 5916.42,5488.58 U9.144@6363.39,5488.58
NetJP6_1: JP6.1 R41.2 | length 108.5
  Component Side w8: R41.2@2779.53,5550 2779.53,5505.47 2800,5485 JP6.1@2800,5450
NetJP6_2: JP6.2 U14.7 | length 634.2
  Component Side w8: U14.7@2762.2,5012.2 2922.2,5012.2 2955,5045 2955,5125 2955,5335 2900,5390 JP6.2@2900,5450
NetJP6_3: JP6.3 R42.1 | length 108.5
  Component Side w8: JP6.3@3000,5450 3000,5490 3020,5510 3020,5549.53 R42.1@3020.47,5550
NetQ3_1: Q3.1 R23.2 U9.23 | length 1773.3
  Component Side w8: U9.23@8287.11,5803.54 8288.57,5805 8360,5805 8365,5800 v1(8400,5800) ; v1(8875,6750) 8870.47,6754.53 R23.2@8870.47,6900 8875,6904.53 8875,6950 8887.6,6962.6 Q3.1@8887.6,7007.68
  Solder Side w8: v1(8400,5800) 8347.63,5852.37 8347.63,5952.37 8450,6054.75 8450,6643 8475,6668 8818,6668 8875,6725 v1(8875,6750)
NetQ4_1: Q4.1 R24.1 U9.26 | length 1841.5
  Component Side w8: v1(8000,5775) 8110.93,5775 U9.26@8113.89,5772.05 ; v1(8700,6750) 8700.47,6750.47 R24.1@8700.47,6895 8700.47,6949.53 8700,6950 8712.6,6962.6 Q4.1@8712.6,7007.68
  Solder Side w8: v1(8000,5775) 8147.63,5775 8434,6061.37 8434,6649.63 8468.37,6684 8659,6684 8700,6725 v1(8700,6750)
NetQ5_1: Q5.1 R25.1 U9.29 | length 1553.7
  Component Side w8: v1(8200,5875) 8200,5725 8215.95,5709.05 U9.29@8287.11,5709.05 ; v1(8525,6750) 8525.47,6750.47 R25.1@8525.47,6895 8525,6895.47 8525,6950 8537.6,6962.6 Q5.1@8537.6,7007.68
  Solder Side w8: v1(8200,5875) 8225,5875 8418,6068 8418,6656.25 8461.75,6700 8500,6700 8525,6725 v1(8525,6750)
NetQ6_1: Q6.1 R31.1 U9.30 | length 5368.7
  Component Side w8: Q6.1@3537.6,7032.68 3537.6,6952.4 3545.47,6944.53 R31.1@3545.47,6900 ; v1(3545,6620) 3545.47,6620.47 3545.47,6795.47 R31.1@3545.47,6900 ; R31.1@3550,6895.47 R31.1@3545.47,6900 ; v1(7627.5,5837.5) 7755.95,5709.05 U9.30@8113.89,5709.05
  Solder Side w8: v1(3545,6620) 6845,6620 v1(7627.5,5837.5)
NetQ6_3: Q6.3 R26.1 | length 172.8
  Component Side w8: Q6.3@3575,7117.32 3575,7175 3590,7190 3645,7190 3654.53,7199.53 R26.1@3654.53,7225
NetQ7_1: Q7.1 R32.1 U9.32 | length 5660.5
  Component Side w8: Q7.1@3262.6,7032.68 3262.6,6982.4 3270.47,6974.53 R32.1@3270.47,6900 3270.47,6595.47 v1(3270,6595) ; v1@7609.9,5815.5 7747.84,5677.56 U9.32@8113.89,5677.56
  Solder Side w8: v1(3270,6595) 3409,6595 ; 3410,6594 6831.4,6594 v1(7607.7,5817.7)
NetQ7_3: Q7.3 R27.1 | length 173.2
  Component Side w8: Q7.3@3300,7117.32 3300,7165 3315,7180 3370,7180 3380,7190 3379.53,7190.47 R27.1@3379.53,7225
NetQ8_1: Q8.1 R33.1 U9.24 | length 5860.6
  Component Side w8: Q8.1@2987.6,7032.68 2987.6,6937.4 2995.47,6929.53 R33.1@2995.47,6900 2995.47,6650.47 v1(2995,6650) ; v1(7667.3,5837.3) 7701.06,5803.54 U9.24@8113.89,5803.54
  Solder Side w8: v1(2995,6650) 3160,6650 ; 3155,6650 3160,6650 ; v1(7667.3,5837.3) 6854.6,6650 3160,6650
NetQ8_3: Q8.3 R28.1 | length 169.9
  Component Side w8: Q8.3@3025,7117.32 3025,7165 3040,7180 3090,7180 3104.53,7194.53 R28.1@3104.53,7225
NetQ9_1: Q9.1 R34.1 U9.31 | length 5576.9
  Component Side w8: Q9.1@3812.6,7032.68 3812.6,6962.4 3820.47,6954.53 R34.1@3820.47,6900 3820,6899.53 3820,6845 3815,6840 v1(3815,6548) ; v1@7590.1,5795.7 7735.8,5650 v1(7900,5650) ; U9.31@8287.11,5677.56 8372.56,5677.56 v1(8390,5695)
  Solder Side w8: v1(3815,6548) 4763,6548 4780,6565 6820.8,6565 v1(7587.9,5797.9) ; v1(7900,5650) 7945,5695 v1(8390,5695)
NetQ9_3: Q9.3 R29.1 | length 183.2
  Component Side w8: Q9.3@3850,7117.32 3850,7165 3860,7175 3925,7175 3935,7185 3935,7219.53 R29.1@3929.53,7225
NetR11_1: R11.1 R12.2 U7.3 | length 166
  Component Side w8: R12.2@3950,6779.53 R11.1@4025,6779.53 4025.47,6780 4075,6780 4082.76,6772.24 U7.3@4112.6,6772.24
NetR14_1: R14.1 R15.2 U8.1 | length 213.7
  Component Side w8: R14.1@4579.53,6525 4600,6525 ; U8.1@4612.6,6627.76 4612.6,6537.6 ; 4619.54,6530.66 4605.66,6530.66 4600,6525 ; R15.2@4645.47,6525 4625,6525 ; 4600,6525 4612.6,6537.6 ; 4600,6525 4625,6525 ; 4612.6,6537.6 4625,6525.2 ; 4625,6525 4625,6525.2 ; 4625,6525 4625,6525.2
NetR18_2: R18.2 SW2.1 U9.25 | length 2727.2
  Component Side w8: U9.25@8287.11,5772.05 9047.05,5772.05 v1(9050,5775) ; SW2.1@9247.05,7161.42 SW2.1@9502.95,7161.42 9502.95,7051.57 R18.2@9504.53,7050 9504.53,6004.53 v1(9500,6000)
  Solder Side w8: v1(9050,5775) 9275,5775 v1(9500,6000)
NetTP11_1: TP11.1 U9.5 | length 924.3
  Component Side w8: U9.5@8287.11,6087.01 8337.01,6087.01 8384,6134 8784,6134 8825,6175 TP11.1@9175,6175
NetTP12_1: TP12.1 U9.6 | length 1328.6
  Component Side w8: U9.6@8113.89,6087.01 8157.01,6087.01 8165.26,6095.26 8165.26,6228.17 8164.88,6228.55 8164.88,6284.88 8220,6340 v1(8490,6340) ; v1(8990,6270) 9180,6270 TP12.1@9175,6275
  Solder Side w8: v1(8490,6340) 8485,6340 8555,6270 v1(8990,6270)
NetTP13_1: TP13.1 U9.109 | length 1602.5
  Component Side w8: TP13.1@5815,6765 5905,6765 5960,6820 6325,6820 6682,6463 6682,6067 6639.02,6024.02 U9.109@6536.61,6024.02 U9.109@6540.63,6020
NetTP14_1: TP14.1 U9.8 | length 1238.9
  Component Side w8: U9.8@8113.89,6055.51 8165.51,6055.51 8209,6099 8209,6176.63 8302.37,6270 8535,6270 v1(8640,6375) ; v1(8980,6375) TP14.1@9175,6375
  Solder Side w8: v1(8640,6375) v1(8980,6375)
NetU2_12: U2.12 U9.20 | length 4194.7
  Component Side w8: U2.12@7702.83,2841.1 U2.12@7689.84,2841.1 7323.9,2841.1 7215,2950 7215,5595 7486.53,5866.53 7993.47,5866.53 8000,5860 8043.47,5860 8050,5866.53 U9.20@8113.89,5866.53
NetU2_13: U2.13 U9.18 | length 4352.1
  Component Side w8: U2.13@7702.83,2821.42 U2.13@7689.84,2821.42 7278.58,2821.42 7155,2945 7155,5610 7445,5900 7991.59,5900 8001.59,5910 8045,5910 8055,5900 8111.92,5900 U9.18@8113.89,5898.03
NetU2_14: U2.14 U9.14 | length 4548
  Component Side w8: U2.14@7702.83,2801.73 7203.27,2801.73 7100,2905 7100,5675 7386.02,5961.02 U9.14@8113.89,5961.02
NetU2_15: U2.15 U9.12 | length 4608.9
  Component Side w8: U2.15@7702.83,2782.05 7200.33,2782.05 7084,2898.37 7084,5681.63 7394.89,5992.52 U9.12@8113.89,5992.52
NetU2_35: U2.35 U9.11 | length 5818
  Component Side w8: U2.35@8057.17,2801.73 8057.9,2801 8148.63,2801 8198.63,2851 9131.25,2851 9257,2976.75 9257,5132 9380,5255 9613.25,5255 9682,5323.75 9682,5688.25 9377.74,5992.52 U9.11@8287.11,5992.52
NetU2_36: U2.36 U9.17 | length 5732.9
  Component Side w8: U2.36@8057.17,2821.42 8104.84,2821.42 8109.26,2817 8142,2817 8192,2867 9124.63,2867 9241,2983.37 9241,5138.63 9373.37,5271 9606.63,5271 9666,5330.37 9666,5681.63 9447.63,5900 v1(9055,5900) ; U9.17@8287.11,5898.03 v1@8463.03,5898.03
  Solder Side w8: v1(8465,5900) v1(9055,5900)
NetU2_37: U2.37 U9.19 | length 5670.5
  Component Side w8: U2.37@8057.17,2841.1 8107.78,2841.1 8115.89,2833 8134.11,2833 8184.11,2883 9118,2883 9225,2990 9225,5145.25 9366.75,5287 9600,5287 9650,5337 9650,5675 9460,5865 v1(9105,5865) ; U9.19@8287.11,5866.53 v1(8512.11,5866.53)
  Solder Side w8: v1(8512.11,5866.53) 9071.53,5866.53 ; 9075,5866.53 v1@9103.47,5866.53
NetU2_64: U2.64 U16.4 | length 4011.3
  Component Side w8: v1(7675,3175) 7732.36,3117.64 U2.64@7732.36,3087.17 ; v1(9175,4225) 9209,4259 9209,5385 9262.6,5438.6 U16.4@9262.6,5477.76
  Solder Side w8: v1(7675,3175) 7675,4175 7725,4225 9035,4225 ; 9125,4225 9035,4225 ; v1(9175,4225) 9035,4225
NetU8_3: U8.3 U9.110 | length 2222.7
  Component Side w8: U8.3@4687.4,6627.76 4690.16,6625 5200,6625 5250,6575 5250,6070 5295.98,6024.02 5624.02,6024.02 v1(5625,6025) ; v1(5905,6024.02) U9.110@6363.39,6024.02
  Solder Side w8: v1(5625,6025) 5625.98,6024.02 v1(5905,6024.02)
NetU9_13: U9.13 U16.3 | length 1160
  Component Side w8: U9.13@8287.11,5961.02 8913.98,5961.02 8940.96,5934.04 9250,5625 9262.6,5612.4 U16.3@9262.6,5572.24
NetU13_3: U13.3 U14.6 | length 238
  Component Side w11.23: U13.3@2536.61,5025 U13.3@2541.61,5020
  Component Side w16.8: U13.3@2536.61,5025 2645,5025 2657.8,5037.8 U14.6@2762.2,5037.8
NetU14_8: U14.8 U15.1 | length 318.1
  Component Side w11.23: U15.1@2500,4851.77 2551.77,4851.77 2686.61,4986.61 U14.8@2762.2,4986.61
POWER_GOOD: JP3.1 Q1.1 SW1.1 U7.1 U9.111 | length 6567
  Component Side w8: Q1.1@2487.6,6932.68 2487.6,6782.4 v1(2495,6775) ; U7.1@4187.4,6772.24 4187.4,6812.4 4250,6875 JP3.1@4250,6925 4250,7040 ; SW1.1@4402.95,7161.42 SW1.1@4147.05,7161.42 4147.05,7067.95 4165,7050 4240,7050 ; v1(5330,6845) 5125,7050 4260,7050 ; v1(5915,6845) 6455,6845 6950,6350 6950,6050 6892.52,5992.52 U9.111@6536.61,5992.52 ; 4240,7050 4250,7050 ; 4240,7050 4250,7040 ; 4250,7040 4250,7050 ; 4250,7040 4260,7050 ; 4250,7050 4260,7050
  Solder Side w8: v1(2495,6775) 3955,6775 4220,6775 4250,6805 JP3.1@4250,6925 ; v1(5330,6845) v1(5915,6845)
PWR_EN: JP4.2 Q2.1 U4.1 U5.1 U6.1 | length 15421.2
  Component Side w8: U4.1@1828,6225 1828,6468 1865,6505 2185,6505 2430,6750 v1(2735,6750) 2737.6,6752.6 Q2.1@2737.6,6932.68 ; JP4.2@4825,6825 4875,6825 4900,6850 v1(4900,7000) ; v1@4898.47,7101.53 4898.47,7242.2 4936.27,7280 6120,7280 6300,7100 8350,7100 8425,7175 v1(8425,7275) ; v1(9100,7325) 9133.85,7291.15 9813.85,7291.15 10260,6845 10260,4475 ; 9225.98,2875.98 9250,2900 9925,2900 10260,3235 10260,4475 ; U6.1@9870,4472.35 10257.35,4472.35 10260,4475
  Component Side w10: U5.1@9225.98,2488.58 9225.98,2875.98
  Solder Side w8: v1(2735,6750) 4700,6750 4775,6825 JP4.2@4825,6825 ; v1(4900,7000) v1(4900,7100) ; v1(8425,7275) 8443.89,7275 8465.89,7297 9072,7297 v1(9100,7325)
TCK: J10.4 U9.1 | length 1025
  Component Side w8: U9.1@8287.11,6150 8775,6150 8925,6300 J10.4@8925,6625
TDI: J10.2 U9.4 | length 1242.6
  Component Side w8: U9.4@8113.89,6118.5 8056.5,6118.5 8000,6175 8000,6350 8350,6700 8700,6700 8725,6675 J10.2@8725,6625
TDO: J10.3 U9.3 | length 1015.4
  Component Side w8: U9.3@8287.11,6118.5 8231.5,6118.5 8225,6125 8225,6170 8240,6185 8585,6185 8825,6425 J10.3@8825,6625
TMS: J10.1 U9.2 | length 988.1
  Component Side w8: U9.2@8113.89,6150 8050,6150 8025,6175 8025,6350 8300,6625 J10.1@8625,6625
VCM: C2_1.1 C2_2.1 R1_1.1 R1_2.1 R2_1.2 R2_2.2 U2.23 | length 933.1
  Component Side w8: C2_2.1@7631.45,2546.45 v1(7665,2580) ; R1_2.1@7632.85,2612.15 v1(7665,2580) ; R2_2.2@7697.15,2547.85 v1(7665,2580) ; v1(7825,2625) 7850.47,2650.47 U2.23@7850.47,2732.83 ; R1_1.1@8134.85,2547.85 v2(8165,2580) ; C2_1.1@8198.49,2548.4 v2(8165,2580) ; R2_1.2@8199.15,2612.15 v2(8165,2580)
  Component Side w20: R1_2.1@7632.85,2612.15 R1_2.1@7634.85,2612.15
  Solder Side w8: v1(7665,2580) 7710,2625 v1(7825,2625) 8120,2625 v2(8165,2580)
pads on no net: J1_1.2 J1_1.4 J1_1.6 J1_2.2 J1_2.4 J1_2.6 J1_3.2 J1_3.4 J1_3.6 J1_4.2 J1_4.4 J1_4.6 J1_5.2 J1_5.4 J1_5.6 J1_6.2 J1_6.4 J1_6.6 J9.2 J9.4 J9.21 J9.22 J9.24 J9.26 T1_1.2 T1_2.2 U1.2 U2.22 U3.5 U3.7 U3.16 U9. U9.7 U9.9 U9.10 U9.82 U9.87 U9.88 U9.89 U9.90 U9.91 U9.92 U9.93 U9.94 U9.97 U9.98 U9.99 U9.100 U9.101 U9.102 U9.103 U9.104 U9.105 U9.106 U9.107 U9.108 U9.113 U9.114 U9.141 U9.143 U9.187 U9.193 U9.194 U9.195 U9.196 U9.197 U9.198 U9.199 U9.200 U10.3 U10.5 U11.3 U11.5 U12.3 U12.5

## Polygon pours and split planes (outlines as drawn)
5V on Solder Side "5VPowerPlane" (solid, remove dead copper, pour order 1000): 1375,5875 1375,1050 6000,1050 6000,4650 3350,4650 3350,5900 1400,5900
5V on Solder Side "5VPowerPlane" (solid, remove dead copper, pour order 1000): 1375,7375 10100,7375 10100,7000 10450,7000 10450,1825 9250,1825 8825,2250 8825,5075 5700,5075 5700,5875 1375,5875
GND on Ground Plane (split plane): 159 vertices, not listed, extent 1020.03,1020.03 10454.97,7379.97
D3V3 on Power Plane (split plane): 167 vertices, not listed, extent 1020.03,1020.03 10454.97,7379.97